# Altium PCB PCB2.PcbDoc
Units mil, origin at the board's own origin, x right, y up, seen from the top; angles counter-clockwise.
Board outline 3140 x 1995 mil, 2 copper layers (Top Layer, Bottom Layer); 11 components, 7 nets, 23 pads, 0 vias.
Unrouted connection lines stored in the file: 2.
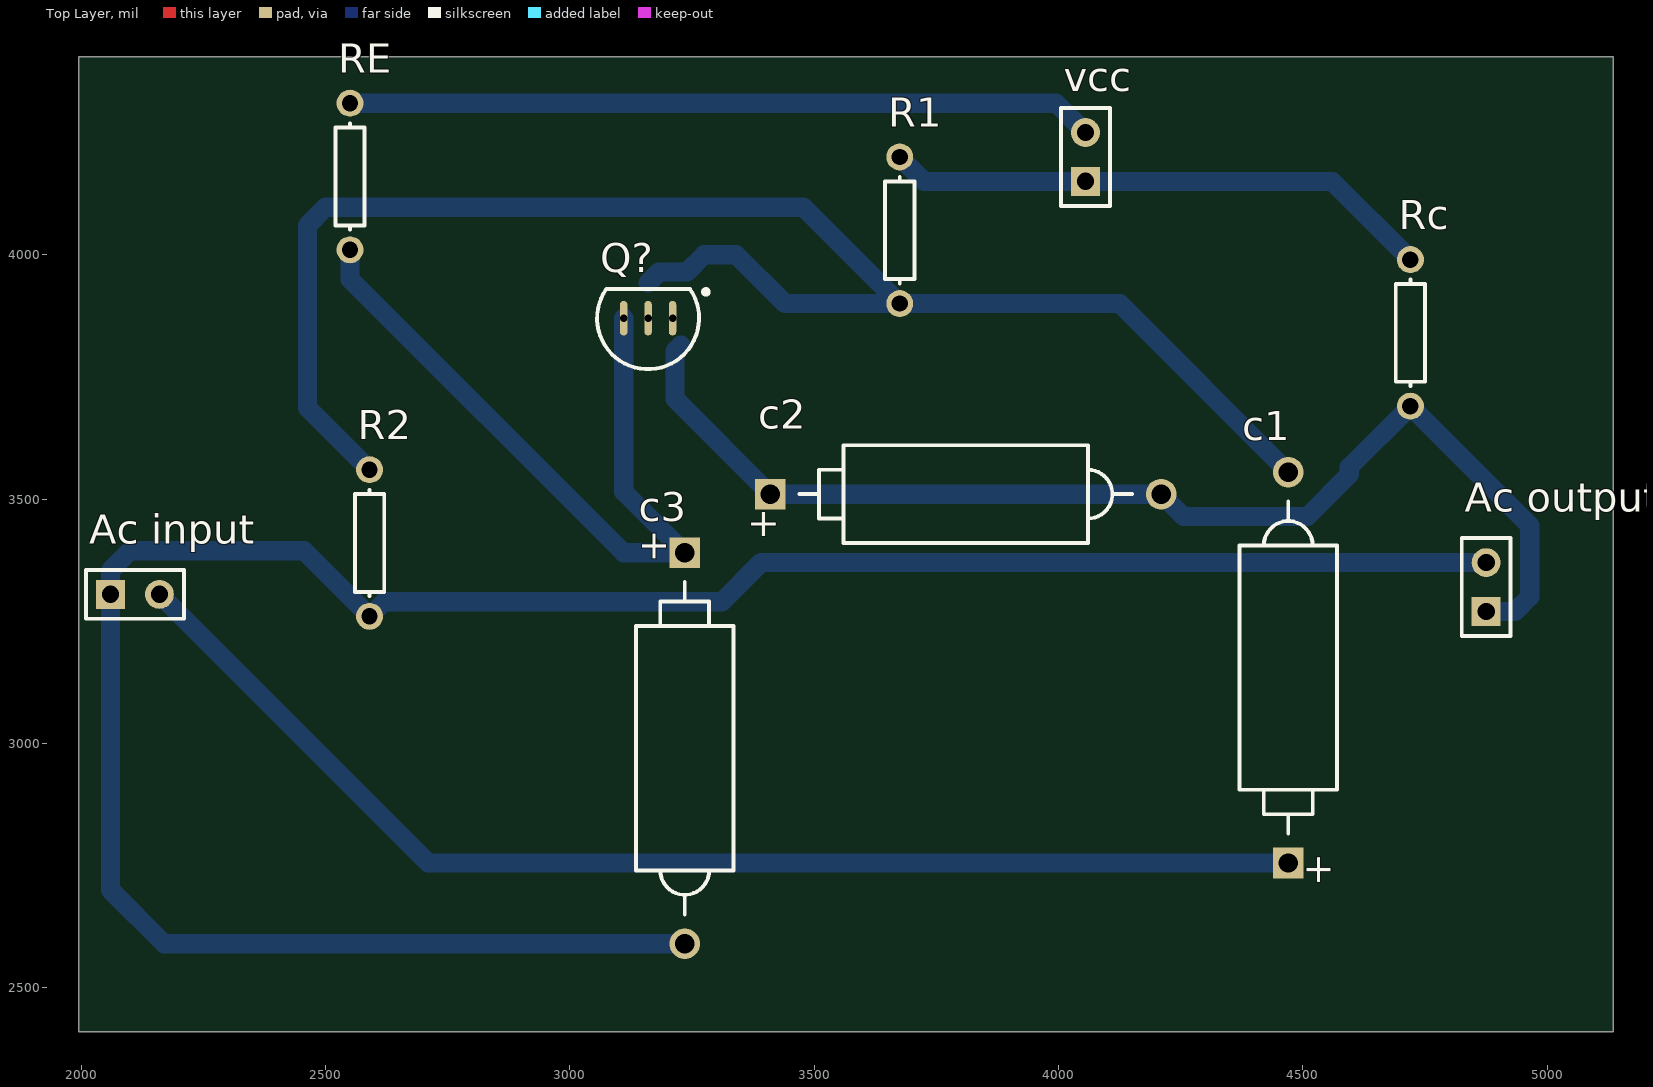
[diagram p0: Top Layer view]
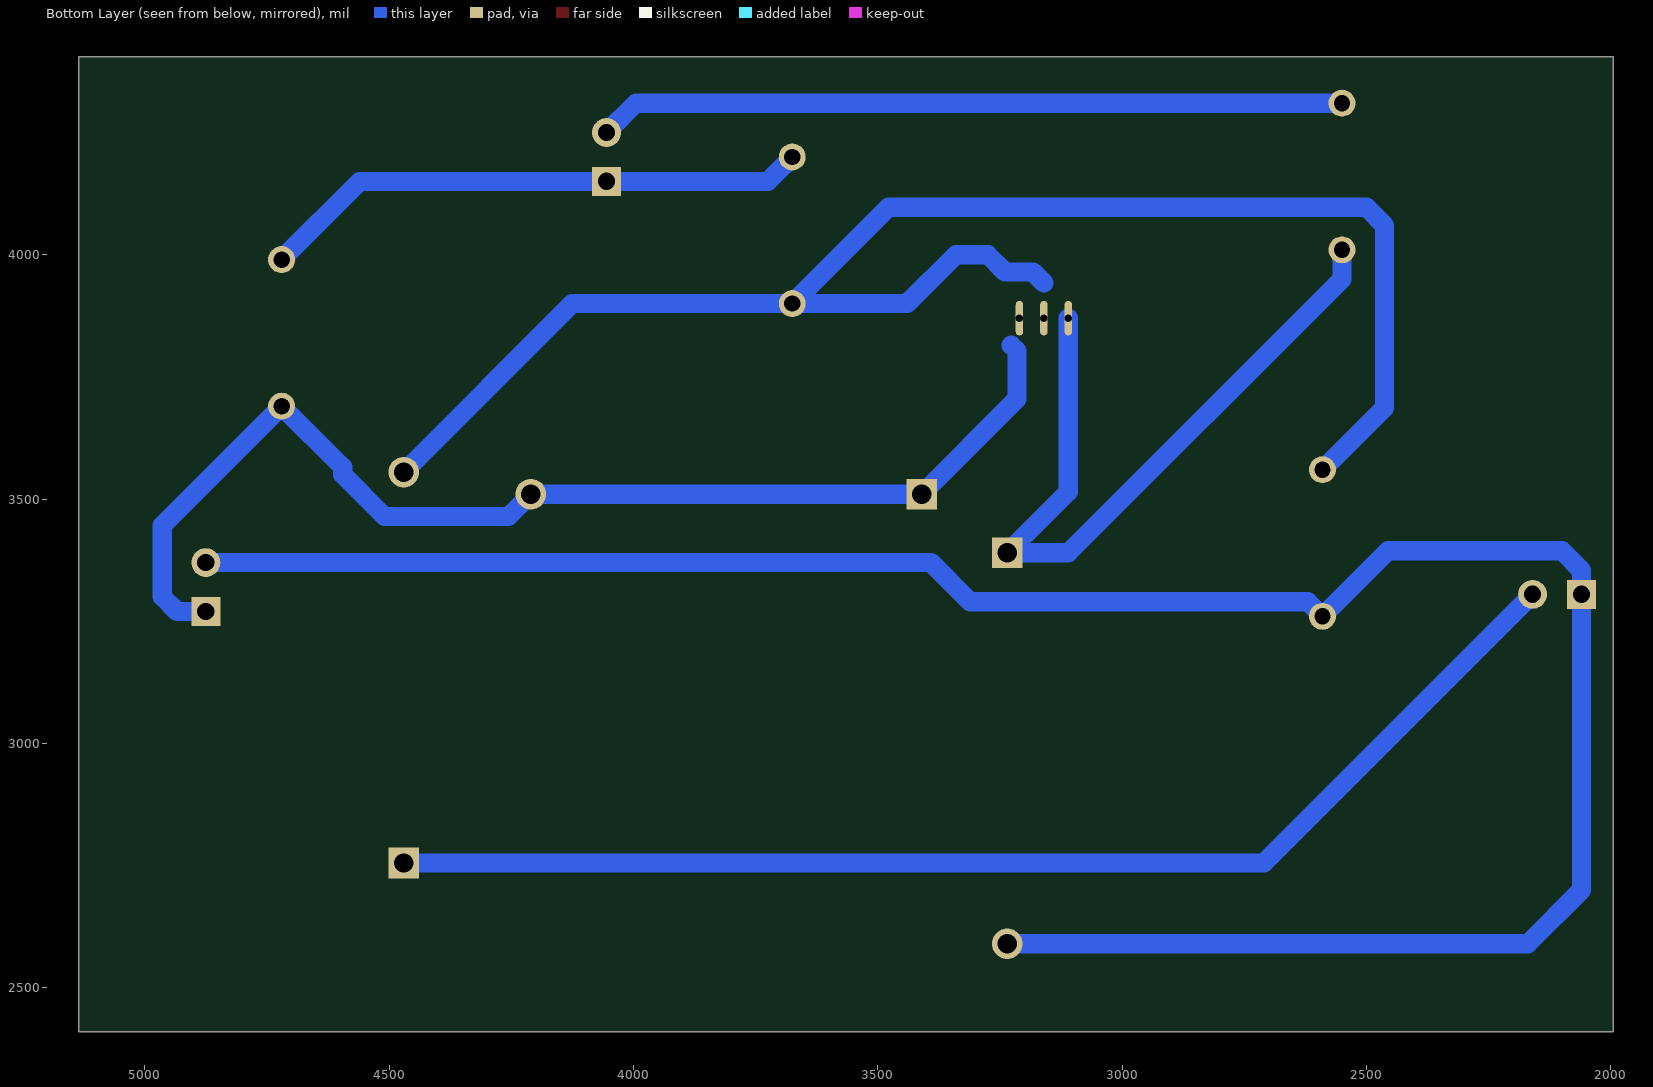
[diagram p1: Bottom Layer view, seen from below]

## Layer stack, top to bottom
Top Solder: solder mask 0.4, Solder Resist, Dk 3.5
Top Layer: signal copper 1.4
Dielectric 1: dielectric 12.6, FR-4, Dk 4.8
Bottom Layer: signal copper 1.4
Bottom Solder: solder mask 0.4, Solder Resist, Dk 3.5

## Board outline
1995,2410 5135,2410 5135,4405 1995,4405

## Design rules (kind name [scope] priority, off if disabled: settings)
Clearance [All] p1: gap=39.37 ignorepadtopadclearanceinfootprint=FALSE
PolygonConnect [All] p1: connectstyle=Direct reliefconductorwidth=10 reliefentries=4 polygonreliefangle="90 Angle" airgapwidth=10
RoutingLayers [All] p1: top layer_v5=FALSE bottom layer_v5=TRUE
RoutingVias [All] p1: holewidth=28 width=50 viastyle="Through Hole" minholewidth=28 minwidth=50 maxholewidth=28 maxwidth=50
SolderMaskExpansion [All] p1: expansion=4 istentingtop=FALSE
Width [All] p1: maxlimit=39.37 minlimit=39.37 preferedwidth=39.37
29 further rules are at their usual default settings.

## Components (designator, comment, footprint, x,y, rotation, side; value= is the part's Value field where it differs from the comment)
"Ac input" "Header 2" HDR1X2 2060,3305 r0 top
"Ac output" "Header 2" HDR1X2 4875,3270 r90 top
c1 "Cap Pol2" POLAR0.8 4470,3155 r270 top value=100pF
c2 "Cap Pol2" POLAR0.8 3810,3510 r180 top value=100pF
c3 "Cap Pol2" POLAR0.8 3235,2990 r90 top value=100pF
Q? "NPN" TO-226-AA 3160,3870 r90 top
R1 "Res1" AXIAL-0.3 3675,4050 r270 top value=1K
R2 "Res1" AXIAL-0.3 2590,3410 r90 top value=1K
Rc "Res1" AXIAL-0.3 4720,3840 r90 top value=1K
RE "Res1" AXIAL-0.3 2550,4160 r270 top value=1K
vcc "Header 2" HDR1X2 4055,4150 r90 top

## Footprints (in the part's own frame and the unit in brackets; to place one, negate y for a bottom-side part, rotate by r counter-clockwise, add the part's x,y. Pads: shape width x height; smd on the part's side, far side on the other; paste and mask are expansions set on the pad)
AXIAL-0.3 [mm] "Axial Device, Thru-Hole; 2 Leads; 0.3 in Pin Spacing"
  round 1.4 hole 0.85: 1(-3.81,0) 2(3.81,0)
  silkscreen extent -2.77,-0.76 2.77,0.76
HDR1X2 [mm] "Connector; Header; 2 Position"
  rect 1.5x1.5 hole 0.9: 1(0,0)
  round 1.5 hole 0.9: 2(2.54,0)
  silkscreen extent -1.27,-1.27 3.81,1.27
POLAR0.8 [mm] "Polarized Capacitor; 2 Leads"
  rect 1.6x1.6 hole 1: 1(10.16,0)
  round 1.6 hole 1: 2(-10.16,0)
  silkscreen extent -8.64,-2.54 8.64,2.54
TO-226-AA [mil] "TO, Flat Index; 3 In-Line, Axial Leads; Body Dia. 4.8mm; Leads 0.55 x 0.51 mm (max)"
  oval 70.74x15.37 hole 15.43: 1(0,-50) 2(0,0) 3(0,50)
  silkscreen extent -104,-123 60,104, body extent -104,-105 60,105, height 210

## Part data
"Ac input" "Ac output" vcc: "Header, 2-Pin", LatestRevisionDate=17-Jul-2002, LatestRevisionNote="Re-released for DXP Platform.", Publisher="Altium Limited"
c1 c2 c3: "Polarized Capacitor (Axial)", LatestRevisionDate=17-Jul-2002, LatestRevisionNote="Re-released for DXP Platform.", PackageDescription="Polarized Capacitor; 2 Leads", PackageReference=POLAR0.8, Published=8-Jun-2000, Publisher="Altium Limited"
Q?: "NPN Bipolar Transistor", Code_JEDEC=TO-226-AA, LatestRevisionDate=17-Jul-2002, LatestRevisionNote="Re-released for DXP Platform.", PackageDescription="TO, Flat Index; 3 In-Line, Axial Leads; Body Dia. 4.8mm; Leads 0.55 x 0.51 mm (max)", PackageReference=TO-226-AA, Published=8-Jun-2000, Publisher="Altium Limited"
R1 R2 Rc RE: "Resistor", LatestRevisionDate=17-Jul-2002, LatestRevisionNote="Re-released for DXP Platform.", PackageDescription="Axial Device, Thru-Hole; 2 Leads; 0.3 in Pin Spacing", PackageReference=AXIAL-0.3, Published=8-Jun-2000, Publisher="Altium Limited"

## Nets (pads, with @x,y where several pads share a name; then routed paths per layer and width w, separated by ;. In a path a pad name is that pad's centre, name@x,y a point inside that pad or via, vN(x,y) a via of type N, cw(c..) or ccw(c..) an arc to the next point about the centre after c; other vN are vias at no path point)
GND: RE.1 vcc.2 | length 1529.9
  Bottom Layer w39.37: RE.1 3995,4310 vcc.2
"Net Ac input_1": "Ac input.1" "Ac output.2" c3.2 R2.1 | length 4807.2
  Bottom Layer w39.37: c3.2 2170,2590 2060,2700 2060,3305 2060,3354 2100,3394 2456,3394 R2.1 2620,3290 3311,3290 3391,3370 4875,3370
"Net Ac input_2": "Ac input.2" c1.1 | length 2537.8
  Bottom Layer w39.37: 2160,3305 2710,2755 c1.1
"Net R2_2": c1.2 Q?.2 R1.2 R2.2 | length 3379.9
  Bottom Layer w39.37: R2.2 2463,3687 2463,4060 2500,4097 3478,4097 R1.2 ; 3160,3942.07 3182.36,3964.42 3239.42,3964.42 3275,4000 3340,4000 3440,3900 R1.2 ; c1.2 4125,3900 R1.2
"NetAc output_1": "Ac output.1" c2.1 c2.2 Q?.1 Rc.1 | length 2414.3
  Bottom Layer w39.37: 3226.74,3814.67 3215,3802.93 3215,3705 c2.1 c2.2 4256,3464 4509,3464 4595,3550 4595,3565 Rc.1 4964,3446 4964,3300 4934,3270 4875,3270
Netc3_1: c3.1 Q?.3 RE.2 | length 1508.7
  Bottom Layer w39.37: RE.2 2550,3950 3110,3390 c3.1 3110,3515 Q?.3
NetR1_1: R1.1 Rc.2 vcc.1 | length 1132
  Bottom Layer w39.37: R1.1 3725,4150 vcc.1 4560,4150 Rc.2

## Dimensions
1985,4405 to 1990,2425 on Top Layer
1995,4415 to 5135,4410 on Top Layer

## Text inside footprints (layer, text, board x,y; h text height)
c1: Top Overlay "+" at 4507.4,2775 h59.06 r270
c2: Top Overlay "+" at 3430,3472.6 h59.06 r180
c3: Top Overlay "+" at 3197.6,3370 h59.06 r90